# EAGLE board NGURAH RAI SMART GATE SYSTEM (EAGLE 9.7.0)

Size 175.53 x 122.83 mm. Coordinates in mm from the lower left corner, seen from the top.
Outline: 0,0 175.53,0 175.53,122.83 0,122.83 0,0
Copper layers (1*16): Top 0.035mm / dielectric 1.5mm / Bottom 0.035mm
Design rules "default": minimum track width 6mil, minimum drill 0.35mm, track to track 6mil, track to pad 6mil, pad to pad 6mil, via to via 6mil, smd to smd 6mil, copper to edge 40mil, drill to drill 6mil, minimum pad ring 10mil, minimum via ring 8mil, stop-mask expansion 4mil, vias tented up to drill 0mil, thermal gap 10mil

## Footprints (pad centres in the part's own frame; a part is rotated, then mirrored left to right if it is on the bottom)
LEDRD254W60D565H860B = drill 0.981 pad 1.581: 1 -1.27,0; 2 1.27,0
HC-SR04 = drill 1.016 long: 1 -3.81,0; 2 -1.27,0; 3 1.27,0; 4 3.81,0
28027 = drill 1.016 long: 1 -2.54,0; 2 0,0; 3 2.54,0
GL5528 = drill 0.8 pad 1.4: 1 -1.702,0; 2 1.702,0
RESAD1016W63L850D250B = drill 0.83 pad 1.43: 1 -5.08,0; 2 5.08,0
HA-06-SM065 = drill 1 pad 1.676: 1 -2.54,-2.54; 2 0,2.54; 3 2.54,-2.54
SG90 = drill 1.016 long: 1 -2.54,0; 2 0,0; 3 2.54,0
ARDUINO-UNO-R3-SHIELD = drill 1.016 pad 1.88: 3.3V 24.13,-2.54; 5V 24.13,0; A0 24.13,12.7; A1 24.13,15.24; A2 24.13,17.78; A3 24.13,20.32; A4 24.13,22.86; A5 24.13,25.4; AREF -24.13,-13.97; D2 -24.13,20.32; D3 -24.13,17.78; D4 -24.13,15.24; D5 -24.13,12.7; D6 -24.13,10.16; D7 -24.13,7.62; D8 -24.13,3.81; D9 -24.13,1.27; D10 -24.13,-1.27; D11 -24.13,-3.81; D12 -24.13,-6.35; D13 -24.13,-8.89; GND@0 24.13,2.54; GND@1 24.13,5.08; GND@2 -24.13,-11.43; IOREF 24.13,-7.62; NC 24.13,-10.16; RES 24.13,-5.08; RX -24.13,25.4; SCL -24.13,-19.05; SDA -24.13,-16.51; TX -24.13,22.86; VIN 24.13,7.62
JHD-162A = drill 1.016 long: 1 -19.05,0; 2 -16.51,0; 3 -13.97,0; 4 -11.43,0; 5 -8.89,0; 6 -6.35,0; 7 -3.81,0; 8 -1.27,0; 9 1.27,0; 10 3.81,0; 11 6.35,0; 12 8.89,0; 13 11.43,0; 14 13.97,0; 15 16.51,0; 16 19.05,0

## Placement (x,y rotation side)
D1  RED  [LEDRD254W60D565H860B]  145.91,80.88 180 top
DIST1  DISTANCE-SENSOR-4PINHC-SR04  [HC-SR04]  107.68,97.69 0 top
PIR1  PIR-SENSOR_28027  [28027]  154.57,116.48 0 top
R1  PHOTOCELL_GL5528  [GL5528]  143.37,58.02 0 top
R2  1k  [RESAD1016W63L850D250B]  144.64,50.4 90 top
R3  220  [RESAD1016W63L850D250B]  129.4,83.42 90 top
RPOT1  250k  [HA-06-SM065]  91.3,58.02 0 top
SERVO1  SERVOSG90  [SG90]  39.61,101.5 270 top
U1  ARDUINO-UNO-R3-SHIELD  [ARDUINO-UNO-R3-SHIELD]  47.88,65.28 270 top
U2  LCD-16X2JHD-162A  [JHD-162A]  112.88,36.63 0 top

## Library data of the parts
D1 = Tinkercad; CATEGORY: Opto-Electronic; SUB-CATEGORY: LED; VALUE: LED_RED
DIST1 PIR1 R1-R3 RPOT1 SERVO1 U1 U2 = Tinkercad

## Nets
D1_C: D1.2 R1.2 R2.2
U1_5V: D1.1 DIST1.1 PIR1.2 R1.1 R3.2 RPOT1.1 SERVO1.2 U1.5V U2.2
U1_D2: U1.D2 U2.14
U1_D3: U1.D3 U2.13
U1_D4: U1.D4 U2.12
U1_D5: U1.D5 U2.11
U1_D7: PIR1.1 U1.D7
U1_D8: DIST1.3 U1.D8
U1_D9: DIST1.2 U1.D9
U1_D11: U1.D11 U2.6
U1_D12: U1.D12 U2.4
U1_D13: SERVO1.3 U1.D13
U1_GND: DIST1.4 PIR1.3 R2.1 RPOT1.3 SERVO1.1 U1.GND@0 U1.GND@1 U1.GND@2 U2.1 U2.5 U2.16
U2_LED+: R3.1 U2.15
U2_VO: RPOT1.2 U2.3

## Tracks (layer width: path | path; a pad name or v marks a point on that pad's centre or on a via)
D1_C  (2 unrouted)
U1_5V  (8 unrouted)
U1_D2  (1 unrouted)
U1_D3  (1 unrouted)
U1_D4  (1 unrouted)
U1_D5  (1 unrouted)
U1_D7  (1 unrouted)
U1_D8  (1 unrouted)
U1_D9  (1 unrouted)
U1_D11  (1 unrouted)
U1_D12  (1 unrouted)
U1_D13  (1 unrouted)
U1_GND  (10 unrouted)
U2_LED+  (1 unrouted)
U2_VO  (1 unrouted)